# Altium PCB Copy of MB1189.PcbDoc (part 1 of 3)
Units mm, origin at the board's own origin, x right, y up, seen from the top; angles counter-clockwise.
Board outline 60.03 x 127.03 mm, 6 copper layers (TOP, L2_GND, L3_VCC, L4_SIG, L5_GND, BOTTOM), stack 1.58 mm thick; 10 components, 264 nets, 52 pads, 0 vias.
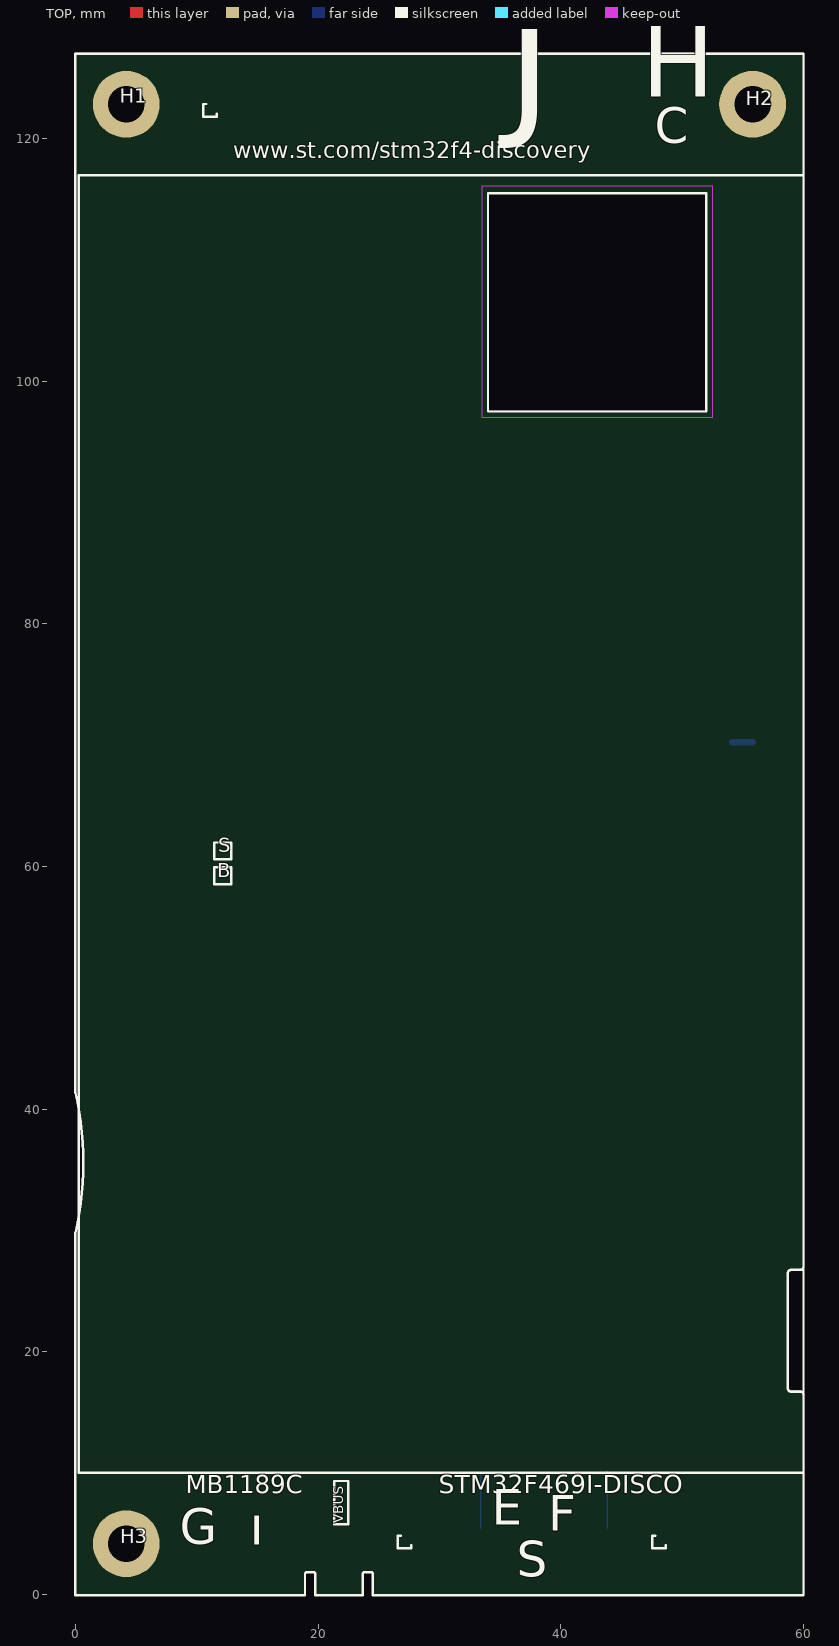
[diagram p0: TOP view]
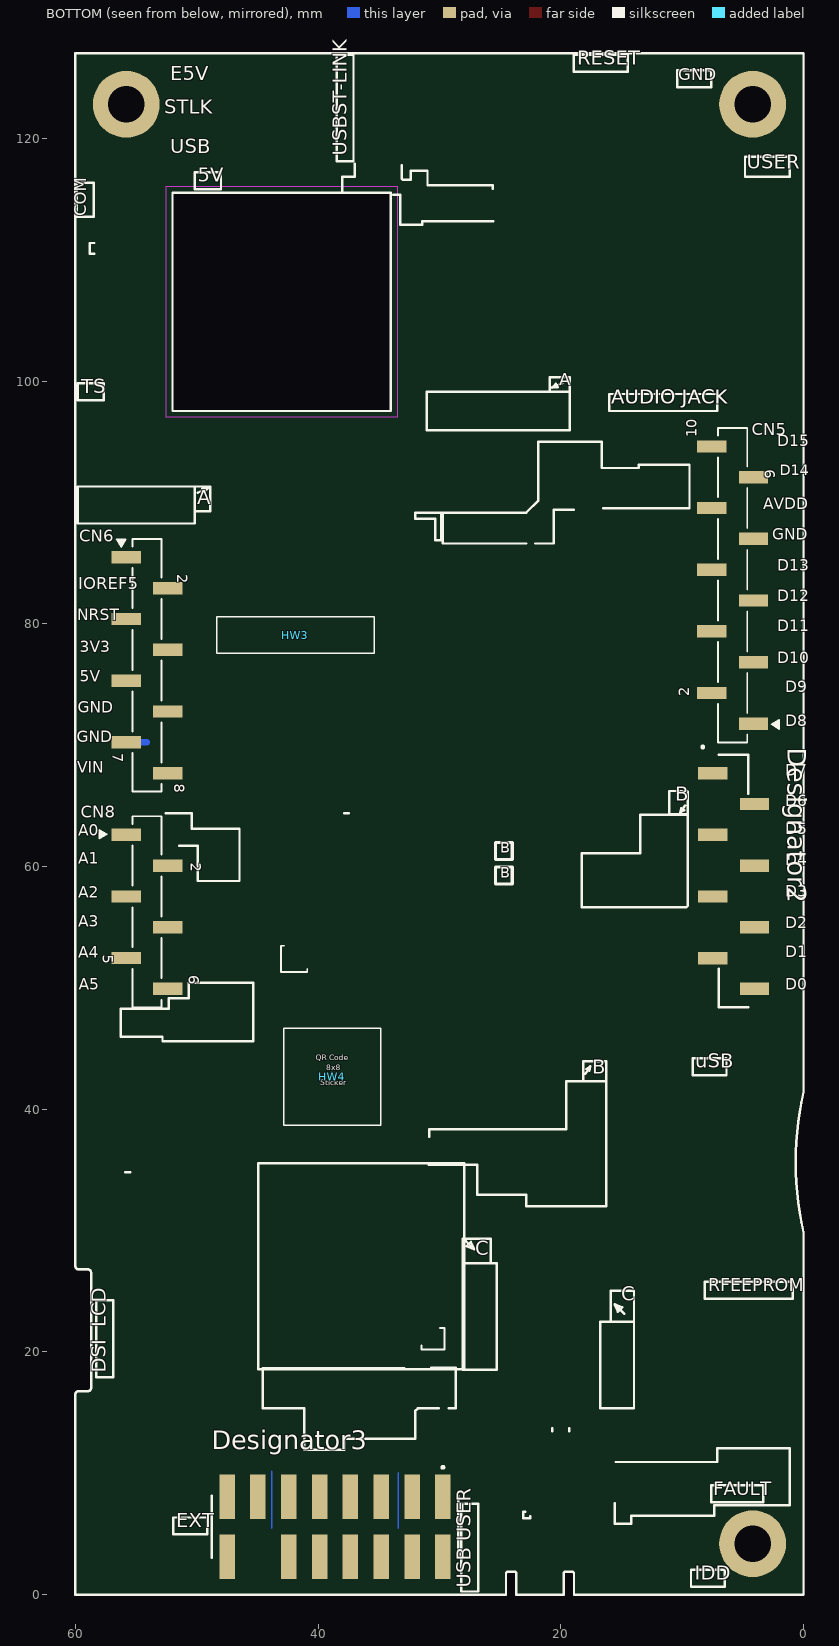
[diagram p1: BOTTOM view, seen from below]
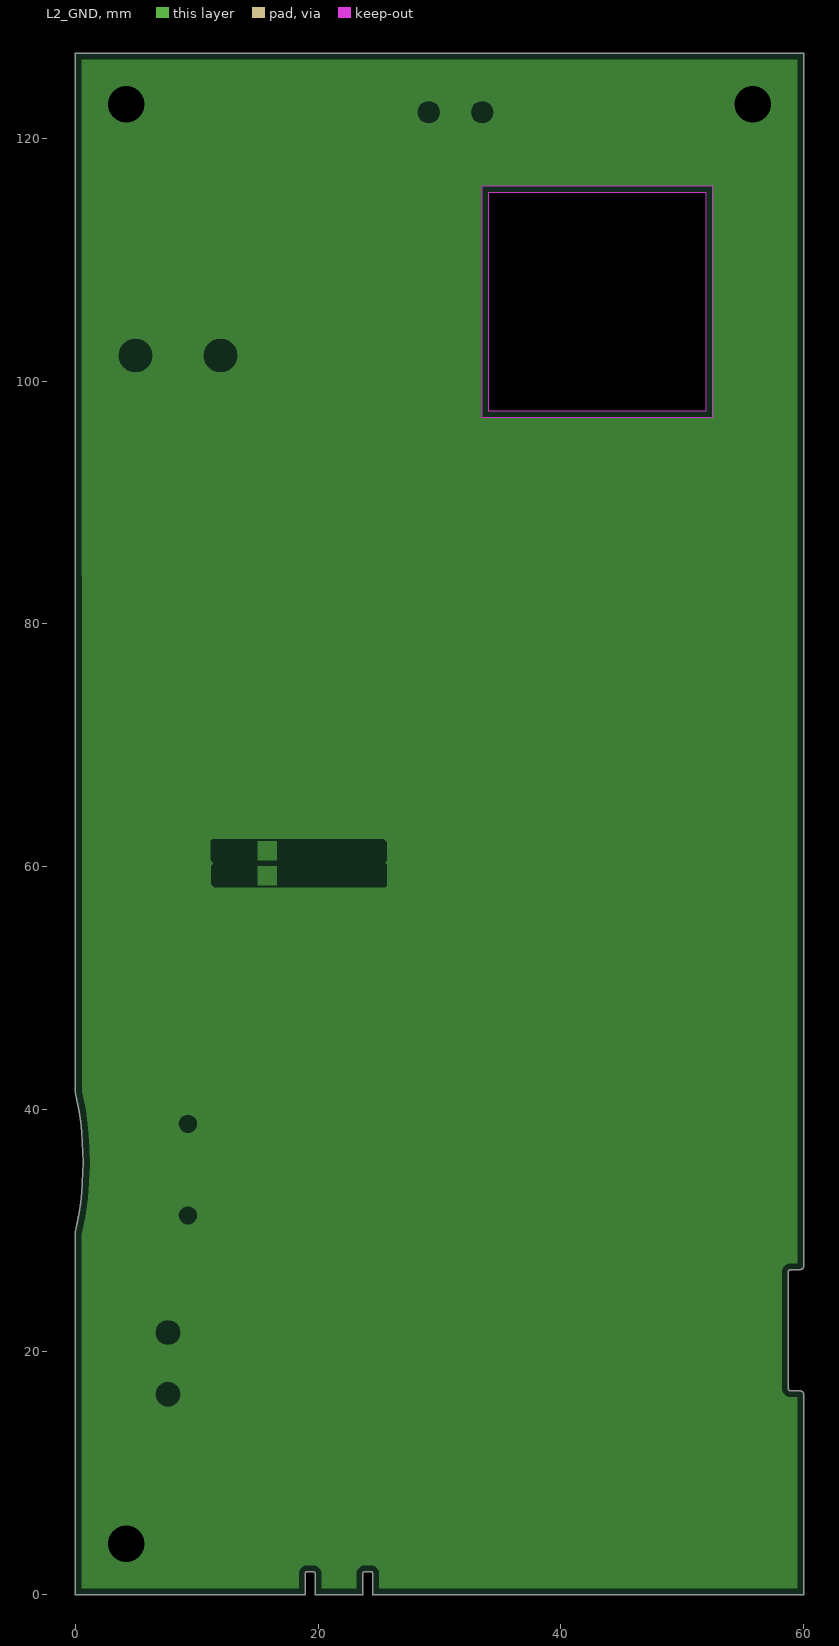
[diagram p2: L2_GND, clearances drawn from the general rule]
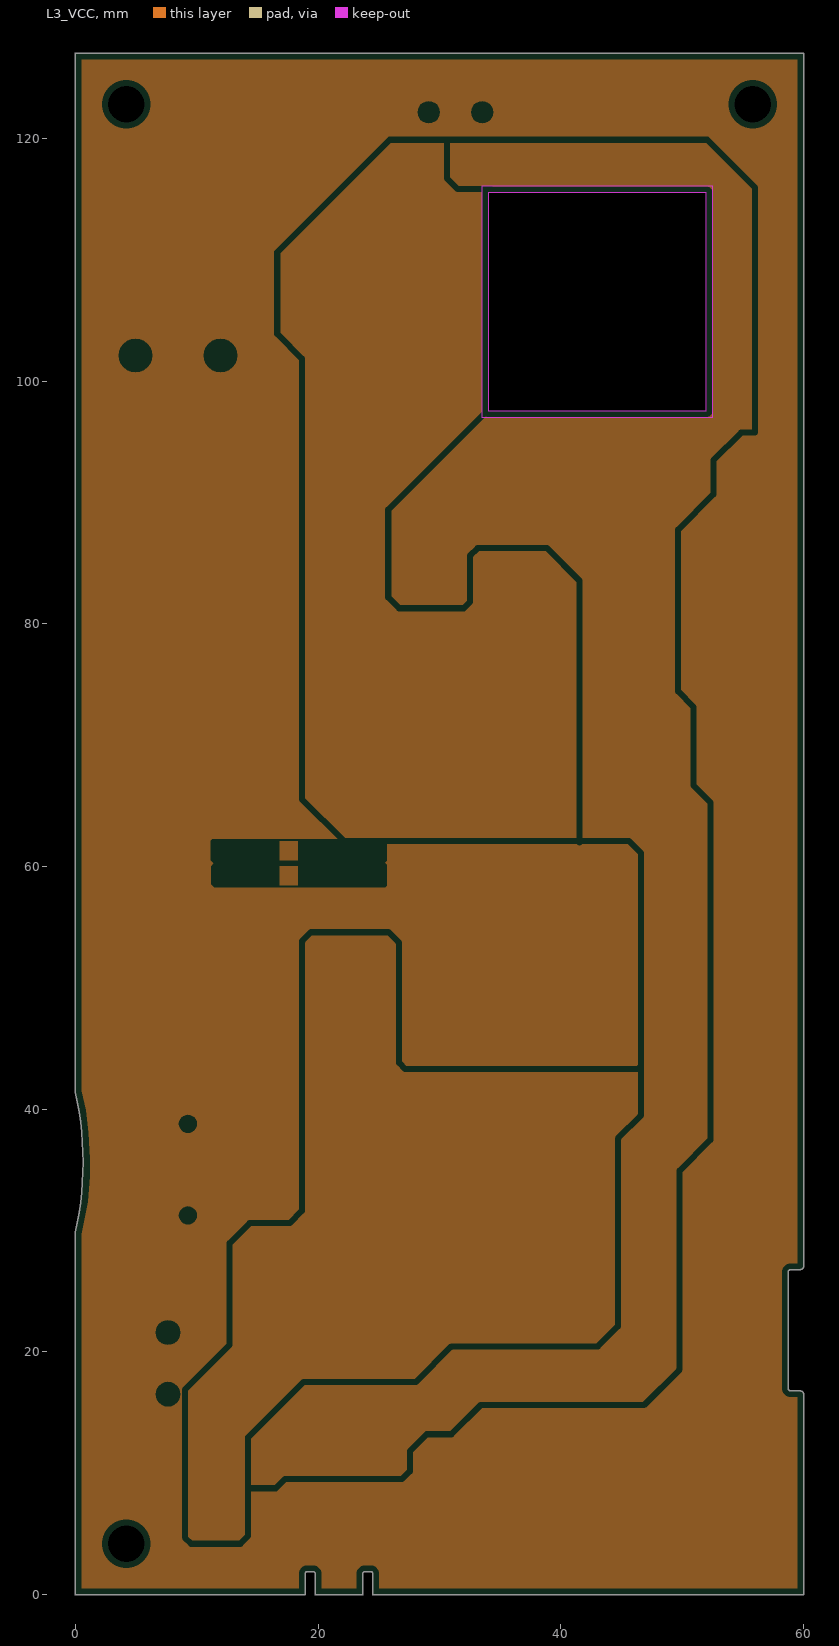
[diagram p3: L3_VCC, clearances drawn from the general rule]
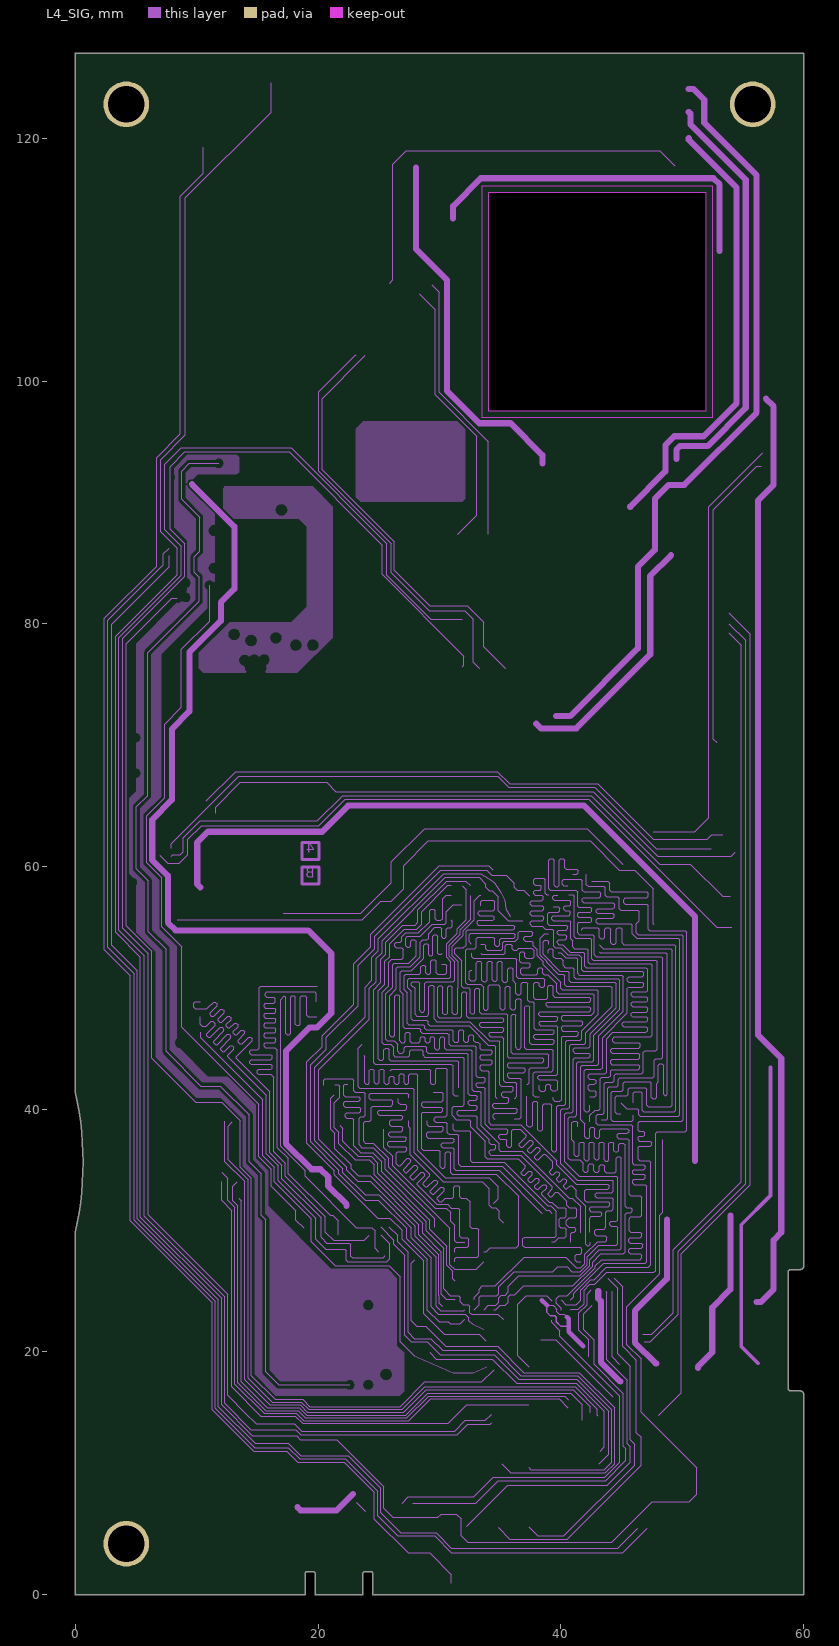
[diagram p4: L4_SIG]
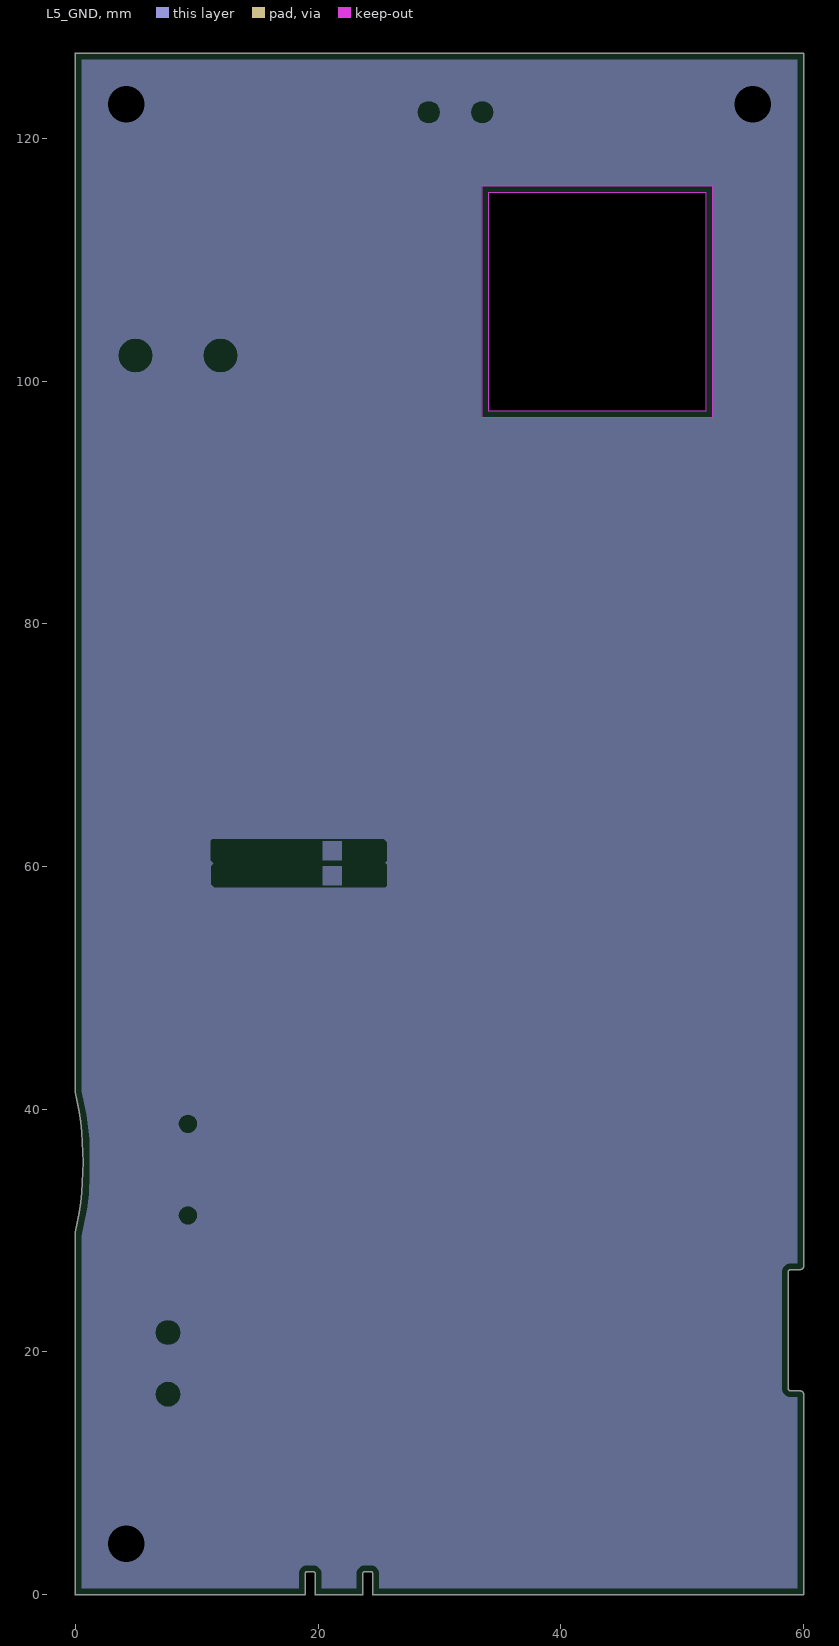
[diagram p5: L5_GND, clearances drawn from the general rule]

## Layer stack, top to bottom
Top Solder: solder mask 0.0102, Solder Resist, Dk 3.5
TOP: signal copper 0.0457
Dielectric 1: core 0.0991, FR-4, Dk 4.3
L2_GND: plane copper 0.0305, net GND
Dielectric2: core 0.1016, FR-4, Dk 4.3
L3_VCC: plane copper 0.0305, net +3V3
Dielectric3: core 0.9652, FR-4, Dk 4.3
L4_SIG: signal copper 0.0305
Dielectric4: core 0.1016, FR-4, Dk 4.3
L5_GND: plane copper 0.0305, net GND
Dielectric5: core 0.0991, FR-4, Dk 4.3
BOTTOM: signal copper 0.0457
Bottom Solder: solder mask 0.0102, Solder Resist, Dk 3.5

## Board outline
0,-0.013 cw(c0,0) -0.013,0 -0.013,29.845 cw(c0,29.845) -0.012,29.849 ccw(c-25.59,35.623) 0.631,35.623 ccw(c-25.59,35.623) -0.012,41.398 cw(c0,41.402) -0.013,41.402 -0.013,127 cw(c0,127) 0,127.013 60,127.013 cw(c60,127) 60.013,127 60.013,27.051 cw(c59.746,27.051) 59.746,26.784 58.967,26.784 ccw(c58.967,26.543) 58.726,26.543 58.726,17.018 ccw(c58.967,17.018) 58.967,16.777 59.746,16.777 cw(c59.746,16.51) 60.013,16.51 60.013,0 cw(c60,0) 60,-0.013 24.517,-0.013 cw(c24.517,0) 24.504,0 24.504,1.78 24.412,1.872 23.772,1.872 23.68,1.78 23.68,0 cw(c23.667,0) 23.667,-0.013 19.767,-0.013 cw(c19.767,0) 19.754,0 19.754,1.78 19.662,1.872 19.022,1.872 18.93,1.78 18.93,0 cw(c18.917,0) 18.917,-0.013
cut-out: 52,97.536 52,115.536 34,115.536 34,97.536

## Design rules (kind name [scope] priority, off if disabled: settings)
Clearance Clearance_Keepout [IsKeepout] p1: gap=0 ignorepadtopadclearanceinfootprint=FALSE
Clearance Clearance_STLK_MCO [(InNet('STLK_MCO') And (Layer = 'L4_SIG')) or (IsVia and Innet('PH0', 'VDD_MCU')) vs InPolygon and (Layer = 'L4_SIG')] p2: gap=0.254 ignorepadtopadclearanceinfootprint=FALSE except(0.153: Via-Fill Via-Poly Via-Region)
Clearance Clearance_BGA [TouchesRoom('RoomDefinition_U11','RoomDefinition_U14')] p3: gap=0.127 ignorepadtopadclearanceinfootprint=FALSE except(0.102: Arc-Arc Arc-Track Arc-SMDPad Arc-THPad Arc-Via Arc-Text Arc-Hole Track-Track Track-SMDPad Track-THPad Track-Via Track-Text Track-Hole SMDPad-Via SMDPad-Text SMDPad-Hole THPad-Via THPad-Text THPad-Hole Via-Text Via-Hole Text-Text Text-Hole; 0.381: Fill-Fill Fill-Poly Fill-Region Poly-Poly Poly-Region Region-Region)
Clearance Clearance_SB [HasFootprint('SB_0603') and IsRegion vs HasFootprint('SB_0603') and IsRegion] p4: gap=0.178 ignorepadtopadclearanceinfootprint=FALSE
Clearance Clearance_2W [InNetClass('A[0..15]') or InNetClass('DATA')] p5: gap=0.127 ignorepadtopadclearanceinfootprint=FALSE except(0.152: SMDPad-Fill SMDPad-Poly SMDPad-Region THPad-Fill THPad-Poly THPad-Region Via-Fill Via-Poly Via-Region Fill-Text Fill-Hole Poly-Text Poly-Hole Region-Text Region-Hole; 0.254: Arc-Fill Arc-Poly Arc-Region Track-Fill Track-Poly Track-Region; 0.508: Fill-Fill Fill-Poly Fill-Region Poly-Poly Poly-Region Region-Region)
Clearance [All] p6: gap=0.127 ignorepadtopadclearanceinfootprint=FALSE except(0.152: Arc-Fill Arc-Poly Arc-Region Track-Fill Track-Poly Track-Region SMDPad-Fill SMDPad-Poly SMDPad-Region THPad-Fill THPad-Poly THPad-Region Via-Fill Via-Poly Via-Region Fill-Text Fill-Hole Poly-Text Poly-Hole Region-Text Region-Hole; 0.508: Fill-Fill Fill-Poly Fill-Region Poly-Poly Poly-Region Region-Region)
DiffPairsRouting DiffPairsRouting_100Ohm [InDifferentialPair('HSSI_CLK', 'HSSI_D0', 'HSSI_D1')] p1: maxlimit=0.279 minlimit=0.102 mostfreqgap=0.277 toplayer_maxgap=0.254 toplayer_prefgap=0.252 toplayer_minwidth=0.127 toplayer_maxwidth=0.254 toplayer_prefwidth=0.129 midlayer1_minwidth=0.102 midlayer1_maxwidth=0.279 midlayer1_prefwidth=0.104 bottomlayer_maxgap=0.254 bottomlayer_prefgap=0.252 bottomlayer_minwidth=0.127 bottomlayer_maxwidth=0.254 bottomlayer_prefwidth=0.129 maxuncoupledlength=12.7
DiffPairsRouting DiffPairsRouting_90Ohm [InDifferentialPair('USB_FS1', 'MICROAB')] p2: maxlimit=0.254 minlimit=0.102 mostfreqgap=0.252 toplayer_maxgap=0.229 toplayer_prefgap=0.226 toplayer_minwidth=0.102 toplayer_maxwidth=0.155 toplayer_prefwidth=0.155 midlayer1_minwidth=0.102 midlayer1_maxwidth=0.13 midlayer1_prefwidth=0.13 bottomlayer_maxgap=0.229 bottomlayer_prefgap=0.226 bottomlayer_minwidth=0.102 bottomlayer_maxwidth=0.155 bottomlayer_prefwidth=0.155 maxuncoupledlength=12.7
HoleSize [All] p1: absolutevalues=TRUE maxlimit=3.048 minlimit=0.025 maxpercent=80.000 minpercent=20.000
MatchedLengths "Schematic Matched Net Lengths_20" [InNetClass('A[0..15]')] p1: tolerance=6.35 checknetsindiffpair=FALSE checkdiffpairvsdiffpair=TRUE checkxsignals=TRUE checkothers=TRUE
MatchedLengths "Schematic Matched Net Lengths_19" [InNet('PC0')] p2: tolerance=6.35 checknetsindiffpair=FALSE checkdiffpairvsdiffpair=TRUE checkxsignals=TRUE checkothers=TRUE
MatchedLengths "Schematic Matched Net Lengths_18" [InNetClass('D[0..31]')] p3: tolerance=6.35 checknetsindiffpair=FALSE checkdiffpairvsdiffpair=TRUE checkxsignals=TRUE checkothers=TRUE
MatchedLengths "Schematic Matched Net Lengths_16" [InNetClass('A[0..11]')] p4: tolerance=6.35 checknetsindiffpair=FALSE checkdiffpairvsdiffpair=TRUE checkxsignals=TRUE checkothers=TRUE
MatchedLengths "Schematic Matched Net Lengths_15" [InNet('PG8')] p5: tolerance=6.35 checknetsindiffpair=FALSE checkdiffpairvsdiffpair=TRUE checkxsignals=TRUE checkothers=TRUE
MatchedLengths "Schematic Matched Net Lengths_14" [InNet('PG15')] p6: tolerance=6.35 checknetsindiffpair=FALSE checkdiffpairvsdiffpair=TRUE checkxsignals=TRUE checkothers=TRUE
MatchedLengths "Schematic Matched Net Lengths_13" [InNet('PH3')] p7: tolerance=6.35 checknetsindiffpair=FALSE checkdiffpairvsdiffpair=TRUE checkxsignals=TRUE checkothers=TRUE
MatchedLengths "Schematic Matched Net Lengths_12" [InNet('PF11')] p8: tolerance=6.35 checknetsindiffpair=FALSE checkdiffpairvsdiffpair=TRUE checkxsignals=TRUE checkothers=TRUE
MatchedLengths "Schematic Matched Net Lengths_11" [InNet('HSSI_CLK_N')] p9: tolerance=2.54 checknetsindiffpair=TRUE checkdiffpairvsdiffpair=FALSE checkxsignals=FALSE checkothers=FALSE
MatchedLengths "Schematic Matched Net Lengths_10" [InNet('HSSI_CLK_P')] p10: tolerance=2.54 checknetsindiffpair=TRUE checkdiffpairvsdiffpair=FALSE checkxsignals=FALSE checkothers=FALSE
MatchedLengths "Schematic Matched Net Lengths_9" [InNet('HSSI_D0_N')] p11: tolerance=2.54 checknetsindiffpair=TRUE checkdiffpairvsdiffpair=FALSE checkxsignals=FALSE checkothers=FALSE
MatchedLengths "Schematic Matched Net Lengths_8" [InNet('HSSI_D0_P')] p12: tolerance=2.54 checknetsindiffpair=TRUE checkdiffpairvsdiffpair=FALSE checkxsignals=FALSE checkothers=FALSE
MatchedLengths "Schematic Matched Net Lengths_7" [InNet('HSSI_D1_N')] p13: tolerance=2.54 checknetsindiffpair=TRUE checkdiffpairvsdiffpair=FALSE checkxsignals=FALSE checkothers=FALSE
MatchedLengths "Schematic Matched Net Lengths_6" [InNet('PF8')] p14: tolerance=2.54 checknetsindiffpair=FALSE checkdiffpairvsdiffpair=TRUE checkxsignals=TRUE checkothers=TRUE
MatchedLengths "Schematic Matched Net Lengths_5" [InNet('PF9')] p15: tolerance=2.54 checknetsindiffpair=FALSE checkdiffpairvsdiffpair=TRUE checkxsignals=TRUE checkothers=TRUE
MatchedLengths "Schematic Matched Net Lengths_4" [InNet('PF7')] p16: tolerance=2.54 checknetsindiffpair=FALSE checkdiffpairvsdiffpair=TRUE checkxsignals=TRUE checkothers=TRUE
MatchedLengths "Schematic Matched Net Lengths_3" [InNet('PF6')] p17: tolerance=2.54 checknetsindiffpair=FALSE checkdiffpairvsdiffpair=TRUE checkxsignals=TRUE checkothers=TRUE
MatchedLengths "Schematic Matched Net Lengths_2" [InNet('PB6')] p18: tolerance=2.54 checknetsindiffpair=FALSE checkdiffpairvsdiffpair=TRUE checkxsignals=TRUE checkothers=TRUE
MatchedLengths "Schematic Matched Net Lengths_1" [InNet('PF10')] p19: tolerance=2.54 checknetsindiffpair=FALSE checkdiffpairvsdiffpair=TRUE checkxsignals=TRUE checkothers=TRUE
MatchedLengths "Schematic Matched Net Lengths" [InNet('HSSI_D1_P')] p20: tolerance=2.54 checknetsindiffpair=TRUE checkdiffpairvsdiffpair=FALSE checkxsignals=FALSE checkothers=FALSE
PlaneClearance PlaneClearance_Fixations [HasFootprint('HOLE_C5R5D3')] p1: clearance=0.381
PlaneClearance "PlaneClearance_Via 16mil" [(ObjectKind = 'Via') And (AsMils(PadXSize_TopLayer) = 16) And (AsMils(PadXSize_MidLayer1) = 16) And (AsMils(PadXSize_BottomLayer) = 16)] p2: clearance=0.229
PlaneClearance PlaneClearance_CN4 [InComponent('CN4')] p3: clearance=0.381
PlaneClearance PlaneClearance_NonPlatedPads [(PadIsPlated = 'False')] p4: clearance=0.406
PlaneClearance PlaneClearance_Via [IsVia] p5: clearance=0.254
PlaneClearance [All] p6: clearance=0.508
PlaneConnect PlaneConnect_Fixations [HasFootprint('HOLE_C5R5D3')] p1: planeconnectstyle=Relief reliefexpansion=0.203 reliefentries=4 reliefconductorwidth=0.762 reliefairgap=0.178
PlaneConnect [All] p2: pad.planeconnectstyle=Relief pad.reliefexpansion=0.203 pad.reliefentries=4 pad.reliefconductorwidth=0.381 pad.reliefairgap=0.178 via.planeconnectstyle=Direct via.reliefexpansion=0.508 via.reliefentries=4 via.reliefconductorwidth=0.254 via.reliefairgap=0.254
PolygonConnect PolygonConnect_CN13 [IsPad and (Name = 'CN13-10')] p1: connectstyle=Direct reliefconductorwidth=0.254 reliefentries=4 polygonreliefangle="90 Angle" airgapwidth=0.254
PolygonConnect [All] p2: thpad.connectstyle=Relief thpad.reliefconductorwidth=0.254 thpad.reliefentries=4 thpad.polygonreliefangle="90 Angle" thpad.airgapwidth=0.152 smdpad.connectstyle=Relief smdpad.reliefconductorwidth=0.254 smdpad.reliefentries=4 smdpad.polygonreliefangle="90 Angle" smdpad.airgapwidth=0.152 via.connectstyle=Direct via.reliefconductorwidth=0.254 via.reliefentries=4 via.polygonreliefangle="90 Angle" via.airgapwidth=0.254
RoutingVias [All] p1: holewidth=0.3 width=0.6 viastyle="Through Hole" minholewidth=0.2 minwidth=0.25 maxholewidth=0.5 maxwidth=0.65
SolderMaskExpansion SolderMaskExpansion_1 [IsVia] p1: expansion=0.076 istentingtop=FALSE soldermaskfromhole=TRUE
SolderMaskExpansion [All] p2: expansion=0.076 istentingtop=FALSE
Width Width_BGA [TouchesRoom('RoomDefinition_U11','RoomDefinition_U14')] p1: maxlimit=1.016 minlimit=0.102 preferedwidth=0.102
Width Width_20mil [InNet('GND', 'E5V', '+1V8', '+3V3', 'VDD_MCU', 'U5V_ST_LINK')] p2: maxlimit=2.032 minlimit=0.127 preferedwidth=0.508
Width [All] p3: maxlimit=1.016 minlimit=0.102 preferedwidth=0.127 toplayer_minwidth=0.127 midlayer1_prefwidth=0.102 bottomlayer_minwidth=0.127 minimp=2.670000 maximp=36.460000 favimp=1.510000
26 further rules are at their usual default settings.

## Classes and differential pairs
net class D[0..31]: D0 D1 D2 D3 D4 D5 D6 D7 D8 D9 D10 D11 D12 D13 D14 D15 D16 D17 D18 D19 D20 D21 D22 D23 D24 D25 D26 D27 D28 D29 D30 D31
net class A[0..15]: A0 A1 A2 A3 A4 A5 A6 A7 A8 A9 A10 A11 A14 A15
component class U_DSI_LCD: ZZ1
component class "U_Arduino_ Connectors": CN5 CN6 CN8
differential pair USB_FS1: +USB_FS1_P -USB_FS1_N
differential pair MICROAB: +MICROAB_P -MICROAB_N
differential pair HSSI_D1: +HSSI_D1_P -HSSI_D1_N
differential pair HSSI_D0: +HSSI_D0_P -HSSI_D0_N
differential pair HSSI_CLK: +HSSI_CLK_P -HSSI_CLK_N

## Components (designator, comment, footprint, x,y, rotation, side; value= is the part's Value field where it differs from the comment)
CN5 "SSW-110-22-X-S-VS" SSW-110-22-X-S-VS 5.842,83.185 r90 bottom
CN6 "SSW-108-22-X-S-VS" SSW-108-22-X-S-VS 54.102,76.581 r270 bottom
CN8 "SAMTEC SSW-106-22-x-S-VS" SSW-106-22-X-S-VS 54.102,56.261 r270 bottom
Designator2 "Comment" SAMTEC_SSW-108-22-X-S-VS 5.765,58.8 r270 bottom
Designator3 "Comment" SAMTEC_TSM-108-01-L-DV-014 38.61,5.585 r180 bottom
H1 "POSITION HOLE" HOLE_C5R5D3 4.191,122.809 r0 top
H2 "POSITION HOLE" HOLE_C5R5D3 55.809,122.809 r0 top
H3 "POSITION HOLE" HOLE_C5R5D3 4.191,4.191 r0 top
HW3 "STICKER_BOARD_CPN" STICKER_BOARD-CPN_13X3 41.87,79.07 r180 bottom
HW4 "STICKER_QR_CODE" STICKER_QR_CODE_8X8 38.82,42.67 r180 bottom

## Footprints (in the part's own frame and the unit in brackets; to place one, negate y for a bottom-side part, rotate by r counter-clockwise, add the part's x,y. Pads: shape width x height; smd on the part's side, far side on the other; paste and mask are expansions set on the pad)
HOLE_C5R5D3 [mil] "HOLE_C5R5D3"
  round 217 / inner round 148 / far side round 217 hole 118: 1(0,0)
  body extent -113,-113 113,113, height 150
SAMTEC_SSW-108-22-X-S-VS [mm]
  rect 1.02x2.41 smd: 01(-8.89,-1.715) 02(-6.35,1.715) 03(-3.81,-1.715) 04(-1.27,1.715) 05(1.27,-1.715) 06(3.81,1.715) 07(6.35,-1.715) 08(8.89,1.715)
  silkscreen extent -11.14,-2.64 10.42,1.2, body extent -10.41,-2.58 10.41,2.58, height 9.91
SAMTEC_TSM-108-01-L-DV-014 [mm]
  rect 1.27x3.68 smd: 01(8.89,2.475) 02(8.89,-2.475) 03(6.35,2.475) 04(6.35,-2.475) 05(3.81,2.475) 06(3.81,-2.475) 07(1.27,2.475) 08(1.27,-2.475) 09(-1.27,2.475) 10(-1.27,-2.475) 11(-3.81,2.475) 12(-3.81,-2.475) 13(-6.35,2.475) 15(-8.89,2.475) 16(-8.89,-2.475)
  silkscreen extent -10.16,-2.54 10.16,5, body extent -10.16,-3.81 10.16,3.89, height 9.65
SSW-106-22-X-S-VS [mil] "SSW-106-22-X-S-VS"
  rect 40x95 smd: 1(-250,-67.5) 2(-150,67.5) 3(-50,-67.5) 4(50,67.5) 5(150,-67.5) 6(250,67.5)
  silkscreen extent -310,-155 310,47, body extent -310,-120 310,120, height 150
SSW-108-22-X-S-VS [mil] "SSW-108-22-X-S-VS"
  rect 40x95 smd: 1(-350,-67.5) 2(-250,67.5) 3(-150,-67.5) 4(-50,67.5) 5(50,-67.5) 6(150,67.5) 7(250,-67.5) 8(350,67.5)
  silkscreen extent -410,-99 410,47, body extent -410,-120 410,120, height 150
SSW-110-22-X-S-VS [mil] "SSW-110-22-X-S-VS"
  rect 40x95 smd: 1(-450,-67.5) 2(-350,67.5) 3(-250,-67.5) 4(-150,67.5) 5(-50,-67.5) 6(50,67.5) 7(150,-67.5) 8(250,67.5) 9(350,-67.5) 10(450,67.5)
  silkscreen extent -510,-150 510,47, body extent -510,-120 510,120, height 150
STICKER_BOARD-CPN_13X3 [mm] "Sticker to mention board CPN code"
  silkscreen extent -6.5,-1.5 6.5,1.5, body extent -6.5,-1.5 6.5,1.5, height 0.01
STICKER_QR_CODE_8X8 [mm] "Sticker to mention board QR code 8X8"
  silkscreen extent -4,-4 4,4

## Part data
CN5: library part "Header 10X1_Female", "Header, 10-Pin, Single row,female", Manuf_1=SAMTEC, Manuf_Part_1=SSW-110-22-x-S-VS, LatestRevisionDate=17-Jul-2002, LatestRevisionNote="Re-released for DXP Platform.", Ordered by=Subcon, Publisher="Altium Limited", Silkscreen="pin names as in schematic"
CN6: library part "Header 8X1_Female", "Header, 8-Pin, Single row,female", Manuf_1=SAMTEC, Manuf_Part_1=SSW-108-22-x-S-VS, LatestRevisionDate=17-Jul-2002, LatestRevisionNote="Re-released for DXP Platform.", Ordered by=Subcon, Publisher="Altium Limited", Silkscreen="pin names as in schematic"
CN8: library part "Header 6X1_Female", "Header, 6-Pin, Single row,female SMD", Manuf_1=SAMTEC, Manuf_Part_1=SSW-106-22-x-S-VS, LatestRevisionDate=17-Jul-2002, LatestRevisionNote="Re-released for DXP Platform.", Ordered by=Subcon, Publisher="Altium Limited", Silkscreen="pin names as in schematic"
H1 H2 H3: Ordered by=Subcon

## Free pads (board coordinates)
  round 0.508 on Mech16: 1(-26.171,-56.053) 1(115.945,-55.727)

## Nets (pads, with @x,y where several pads share a name; then routed paths per layer and width w, separated by ;. In a path a pad name is that pad's centre, name@x,y a point inside that pad or via, vN(x,y) a via of type N, cw(c..) or ccw(c..) an arc to the next point about the centre after c; other vN are vias at no path point)
+1V8: 
+3V3: CN6.2 CN6.4
+3V3_ST_LINK:  | length 29.6
  L4_SIG w0.508: 31.115,113.411 31.115,114.427 33.401,116.713 52.578,116.713 53.086,116.205 53.086,110.744
+5V: CN6.5
A:  | length 13.7
  L4_SIG w0.508: 51.308,18.669 51.308,18.796 52.476,19.964 52.476,23.647 53.975,25.146 53.975,31.242
A0:  | length 22
  L4_SIG w0.102: 21.336,41.199 21.031,40.894 21.031,38.354 21.387,37.998 21.387,36.754 22.733,35.408 22.733,35.077 23.317,34.493 24.284,34.493 28.296,30.482 28.296,29.643 29.947,27.992 29.947,24.68 29.972,24.655 29.972,24.019 30.242,23.749
A1:  | length 23.4
  L4_SIG w0.102: 21.387,42.012 21.666,42.012 21.793,41.885 21.793,40.97 21.336,40.513 21.336,38.48 21.717,38.099 21.717,37.135 23.038,35.814 24.232,35.814 24.613,35.433 24.613,34.596 28.6,30.608 28.6,29.769 30.15,28.22 30.15,24.764 30.569,24.346 31.2,24.346 31.272,24.274
A2:  | length 25.8
  L4_SIG w0.102: 22.454,42.037 22.2,42.037 22.123,41.961 22.123,41.148 22.25,41.021 23.343,41.021 23.47,40.894 23.47,40.767 23.343,40.64 22.225,40.64 22.098,40.513 22.098,40.284 22.225,40.157 23.368,40.157 23.495,40.03 23.495,39.827 23.368,39.7 22.352,39.7 22.225,39.573 22.225,39.37 22.352,39.243 22.809,39.243 22.936,39.116 22.936,36.982 23.495,36.424 24.232,36.424 ; 24.232,36.424 24.484,36.424 25.222,35.686 25.222,34.849 29.21,30.861 29.21,30.093 29.433,29.87 29.439,29.87 30.607,28.702 30.607,27.144 31.11,26.641 31.11,26.035 31.272,25.874
A3:  | length 23.6
  L4_SIG w0.102: 27.483,39.04 27.483,38.557 27.61,38.43 27.61,36.246 29.21,34.646 29.21,34.493 28.652,33.935 28.652,33.756 28.808,33.6 28.988,33.6 29.55,34.162 29.719,34.162 29.838,34.043 29.838,33.875 29.245,33.282 29.245,33.138 29.388,32.994 29.532,32.994 30.112,33.574 30.281,33.574 30.4,33.456 30.4,33.287 29.82,32.707 29.82,32.563 29.997,32.385 30.175,32.385 30.463,32.673 31.039,32.673 31.166,32.8 31.166,33.553 31.293,33.68 31.547,33.68 31.674,33.553 31.674,32.8 31.801,32.673 32.199,32.673 32.516,32.355 32.516,30.328 32.643,30.201 33.122,30.201 33.249,30.074 33.249,27.94 33.122,27.813 31.399,27.813 31.272,27.686 31.272,27.428
A4:  | length 35.2
  L4_SIG w0.102: 26.619,40.843 26.619,40.513 26.746,40.386 27.178,40.386 27.305,40.259 27.305,40.047 27.178,39.92 25.019,39.92 24.892,39.793 24.892,39.641 25.019,39.514 26.848,39.514 26.975,39.387 26.975,39.243 26.848,39.116 26.035,39.116 25.908,38.989 25.908,38.735 26.035,38.608 26.848,38.608 26.975,38.481 26.975,38.278 26.848,38.151 25.951,38.151 25.832,38.032 25.832,37.864 25.951,37.744 27.168,37.744 27.28,37.633 27.28,37.475 27.168,37.363 25.857,37.363 25.73,37.236 25.73,37.033 25.857,36.906 27.179,36.906 27.305,36.78 27.305,36.601 27.179,36.474 26.568,36.474 26.441,36.347 26.441,35.509 26.603,35.347 26.747,35.347 27.34,35.94 27.484,35.94 27.628,35.796 27.628,35.652 27.035,35.06 27.035,34.916 27.179,34.772 27.322,34.772 27.915,35.365 28.059,35.365 28.203,35.221 28.203,35.077 27.61,34.485 27.61,34.341 27.754,34.197 27.897,34.197 28.49,34.79 28.634,34.79 28.778,34.646 28.778,34.502 28.185,33.91 28.185,33.766 29.794,32.156 30.683,32.156 30.988,31.852 31.547,31.852 31.674,31.725 31.674,29.54 31.801,29.413 32.3,29.413 32.427,29.286 32.427,28.753 32.3,28.626 31.399,28.626 31.272,28.499 31.272,28.228
A5:  | length 13
  L4_SIG w0.102: 25.425,38.329 25.425,36.83 26.137,36.119 26.137,35.357 29.642,31.852 30.556,31.852 30.916,31.492 30.916,30.755 31.242,30.429 31.242,29.155 31.369,29.028 32.072,29.028
A6: 
A7: 
A8:  | length 30
  L4_SIG w0.102: 23.749,44.45 23.825,44.374 23.825,42.182 23.944,42.062 24.112,42.062 24.232,42.182 24.232,43.188 24.351,43.307 24.519,43.307 24.638,43.188 24.638,42.207 24.757,42.088 24.925,42.088 25.044,42.207 25.044,43.188 25.164,43.307 25.332,43.307 25.451,43.188 25.451,42.182 25.57,42.062 25.738,42.062 25.857,42.182 25.857,42.604 25.976,42.723 26.144,42.723 26.264,42.604 26.264,42.182 26.383,42.062 26.551,42.062 26.67,42.182 26.67,42.807 26.789,42.926 26.957,42.926 27.076,42.807 27.076,42.182 27.196,42.062 27.364,42.062 27.483,42.182 27.483,42.799 27.61,42.926 28.092,42.926 28.219,42.799 28.219,36.601 30.48,34.341 34.112,34.341 34.849,33.604 34.849,32.605 34.472,32.228
A9: 
A10: 
A11:  | length 24.4
  L4_SIG w0.102: 23.622,45.339 23.317,45.034 23.317,41.859 23.444,41.732 27.788,41.732 27.915,41.605 27.915,36.424 30.315,34.023 33.515,34.023 34.116,33.422 34.116,32.081 34.325,31.873 34.625,31.873 34.916,31.581 34.916,30.984 35.272,30.628
A14:  | length 27
  L4_SIG w0.102: 25.933,43.155 25.933,43.18 26.06,43.307 29.144,43.307 29.271,43.18 29.271,42.139 29.372,42.037 29.576,42.037 29.677,42.139 29.677,43.256 29.779,43.358 30.531,43.358 30.658,43.231 30.658,39.522 30.531,39.395 29.693,39.395 29.566,39.268 29.566,39.065 29.693,38.938 30.531,38.938 30.658,38.811 30.658,38.049 30.785,37.922 31.445,37.922 31.572,37.795 31.572,35.458 31.75,35.281 35.179,35.281 38.807,31.652 39.04,31.652 39.264,31.428
A15:  | length 19.1
  L4_SIG w0.102: 28.981,39.04 28.981,38.735 29.108,38.608 30.175,38.608 30.302,38.481 30.302,38.252 30.175,38.125 29.058,38.125 28.931,37.998 28.931,37.744 29.058,37.617 31.09,37.617 31.217,37.49 31.217,37.363 31.09,37.236 30.276,37.236 30.15,37.11 30.15,36.931 30.276,36.805 31.09,36.805 31.217,36.678 31.217,35.077 31.344,34.95 34.925,34.95 38.447,31.428 38.464,31.428
AIN_1: 
AUDIO_RST: 
BLGND: 
BLVDD: 
BOOT0: 
CABC: 
CUR_SEL: 
D0:  | length 55.7
  L4_SIG w0.102: 30.963,57.633 30.556,57.633 30.251,57.328 30.251,55.702 30.124,55.575 29.794,55.575 29.667,55.702 29.667,56.363 29.54,56.49 29.312,56.49 29.185,56.363 29.185,55.448 28.27,54.534 27.203,54.534 26.873,54.204 26.873,53.873 26.746,53.746 26.441,53.746 26.314,53.619 26.314,53.419 26.419,53.315 26.899,53.315 27.026,53.188 27.026,52.476 26.899,52.349 26.086,52.349 25.832,52.095 25.832,50.19 25.273,49.632 25.273,45.466 25.4,45.339 25.984,45.339 26.213,45.11 26.213,44.442 26.332,44.323 27.44,44.323 27.559,44.442 27.559,44.755 27.686,44.882 28.524,44.882 28.651,44.755 28.651,44.425 28.778,44.298 31.914,44.298 32.041,44.171 32.041,40.386 31.914,40.259 31.166,40.259 31.039,40.132 31.039,39.497 31.394,39.141 32.461,39.141 32.588,39.014 32.588,38.823 32.588,38.557 33.782,37.363 33.782,36.068 33.934,35.916 36.474,35.916 37.073,35.317 37.073,35.174 36.721,34.822 36.721,34.679 36.865,34.534 37.008,34.534 37.36,34.887 37.503,34.887 37.648,34.742 37.648,34.599 37.296,34.247 37.296,34.104 37.44,33.959 37.583,33.959 37.935,34.312 38.078,34.312 38.223,34.167 38.223,34.024 37.871,33.672 37.871,33.529 38.015,33.384 38.158,33.384 38.403,33.63 38.536,33.762 38.704,33.762 38.823,33.643 38.823,33.475 38.446,33.097 38.446,32.953 39.052,32.347 39.256,32.347 39.73,31.873 40.31,31.873 40.437,31.746 40.437,31.191 40.31,31.064 39.98,31.064 39.853,30.937 39.853,30.353 39.98,30.226 40.31,30.226 40.437,30.099 40.437,29.528 40.31,29.401 39.84,29.401 39.501,29.062 39.26,29.062
D1:  | length 55.5
  L4_SIG w0.102: 31.818,56.849 31.119,56.849 30.556,56.286 30.556,55.372 30.429,55.245 29.413,55.245 28.397,54.229 27.33,54.229 27.203,54.102 27.203,53.466 27.33,53.34 27.509,53.34 27.635,53.466 27.635,53.848 27.762,53.975 27.94,53.975 28.067,53.848 28.067,52.654 27.457,52.045 26.264,52.045 26.137,51.918 26.137,50.063 25.578,49.505 25.578,45.771 25.705,45.644 26.264,45.644 26.543,45.364 26.543,44.755 26.67,44.628 26.949,44.628 27.076,44.755 27.076,45.06 27.203,45.187 28.829,45.187 28.956,45.06 28.956,44.729 29.083,44.602 32.258,44.602 32.385,44.475 32.385,41.25 32.487,41.149 33.002,41.149 33.122,41.029 33.122,40.861 33.002,40.742 32.511,40.742 32.385,40.616 32.385,40.437 32.511,40.31 32.977,40.31 33.096,40.191 33.096,40.023 32.977,39.904 31.597,39.904 31.471,39.777 31.471,39.598 31.597,39.472 32.995,39.472 33.122,39.345 33.122,38.456 34.088,37.489 34.088,37.236 34.215,37.109 34.493,37.109 34.62,36.982 34.62,36.779 34.493,36.652 34.214,36.652 34.087,36.525 34.087,36.347 34.214,36.22 36.678,36.22 39.311,33.587 39.311,33.443 38.951,33.083 38.951,32.939 39.095,32.795 39.239,32.795 39.599,33.155 39.743,33.155 40.471,32.427 40.471,32.081 40.679,31.873 41.173,31.873 41.3,31.746 41.3,31.166 41.173,31.039 40.691,31.039 40.437,30.785 40.437,30.48 40.665,30.251 41.123,30.251 41.25,30.124 41.25,29.972 41.123,29.845 40.953,29.845 40.826,29.718 40.826,29.028
D2:  | length 28.2
  L4_SIG w0.102: 30.988,58.445 30.977,58.457 30.694,58.457 28.524,56.287 28.524,55.245 28.118,54.839 27.076,54.839 25.883,53.645 25.883,52.578 25.476,52.172 25.476,50.292 24.943,49.759 24.943,44.145 25.07,44.018 25.298,44.018 25.425,44.145 25.425,44.907 25.552,45.034 25.73,45.034 25.857,44.907 25.857,44.12 25.984,43.993 31.445,43.993 31.572,43.866 31.572,41.783
D3:  | length 29.6
  L4_SIG w0.102: 31.55,41.123 31.242,41.123 31.115,41.25 31.115,43.561 30.988,43.688 24.714,43.688 24.587,43.815 24.587,49.86 25.171,50.444 25.171,52.349 25.578,52.756 25.578,53.772 26.975,55.169 27.991,55.169 28.219,55.397 28.219,56.413 30.607,58.801 32.17,58.801 32.53,58.442
D4:  | length 27.8
  L4_SIG w0.102: 31.876,58.422 32.206,58.092 32.206,55.624 31.451,54.87 31.451,54.514 30.582,53.645 30.582,52.502 30.937,52.146 30.937,50.927 30.81,50.8 27.508,50.8 27.381,50.673 27.381,49.987 27.661,49.708 27.661,47.447 27.788,47.32 28.931,47.32 29.058,47.193 29.058,46.99 29.185,46.863 32.436,46.863 34.023,45.276 34.519,45.276 34.646,45.149 34.646,40.996 34.722,40.919
D5:  | length 45.4
  L4_SIG w0.102: 32.561,57.578 32.561,55.65 31.709,54.798 31.709,54.422 30.785,53.497 30.785,52.603 31.242,52.146 31.242,50.622 31.115,50.495 28.931,50.495 28.804,50.368 28.804,48.132 28.677,48.006 28.498,48.006 28.372,48.132 28.372,50.368 28.245,50.495 27.813,50.495 27.686,50.368 27.686,50.216 27.813,50.089 27.889,50.089 28.016,49.962 28.016,47.803 28.143,47.676 29.007,47.676 29.134,47.803 29.134,50.089 29.261,50.216 29.439,50.216 29.566,50.089 29.566,47.447 29.794,47.219 32.512,47.219 34.099,45.631 34.887,45.631 34.976,45.542 34.976,42.012 35.103,41.885 35.941,41.885 36.068,41.758 36.068,41.554 35.941,41.427 35.255,41.427 35.128,41.3 35.128,41.097 35.255,40.97 35.585,40.97 35.712,40.843 35.712,40.615 35.585,40.488 34.519,40.488 34.392,40.361 34.392,40.183 34.519,40.056 36.279,40.056 36.398,39.937 36.398,39.769 36.279,39.649 34.544,39.649 34.417,39.522 34.417,39.294 34.544,39.167 34.569,39.167
D6:  | length 48.2
  L4_SIG w0.102: 33.401,56.769 33.401,57.099 33.528,57.226 34.442,57.226 34.569,57.099 34.569,56.49 34.442,56.363 33.317,56.363 33.198,56.243 33.198,56.075 33.317,55.956 34.374,55.956 34.493,55.837 34.493,55.669 34.374,55.55 33.208,55.55 33.096,55.438 33.096,55.28 33.208,55.169 36.093,55.169 36.22,55.042 36.22,54.914 36.094,54.788 32.334,54.788 32.207,54.661 32.207,53.518 31.979,53.289 31.394,53.289 31.267,53.162 31.267,52.812 31.852,52.227 31.852,50.114 31.979,49.987 32.41,49.987 32.537,49.86 32.537,47.965 32.649,47.854 32.807,47.854 32.918,47.965 32.918,49.843 33.038,49.962 33.206,49.962 33.325,49.843 33.325,47.981 33.452,47.854 35.484,47.854 35.611,47.727 35.611,44.323 35.712,44.221 38.489,44.221 38.608,44.102 38.608,43.934 38.489,43.815 35.712,43.815 35.611,43.713 35.611,43.51 35.712,43.409 36.939,43.409 37.059,43.289 37.059,43.121 36.939,43.002 35.712,43.002 35.611,42.901 35.611,42.672 35.738,42.545 36.601,42.545 36.728,42.418 36.728,39.319 36.601,39.192 36.144,39.192
D7:  | length 44.6
  L4_SIG w0.102: 33.388,57.632 33.299,57.632 32.855,57.188 32.855,55.613 31.953,54.712 31.953,54.331 31.039,53.416 31.039,52.654 31.547,52.146 31.547,49.987 31.521,49.962 31.521,47.93 31.394,47.803 31.191,47.803 31.064,47.93 31.064,50.063 30.937,50.19 30.81,50.19 30.683,50.063 30.683,47.922 30.564,47.803 30.396,47.803 30.277,47.922 30.277,50.046 30.158,50.165 29.99,50.165 29.87,50.046 29.87,47.65 29.997,47.523 31.699,47.523 31.826,47.65 31.826,49.563 31.945,49.682 32.113,49.682 32.233,49.563 32.233,47.676 32.36,47.549 35.161,47.549 35.281,47.43 35.281,47.262 35.161,47.142 33.444,47.142 33.325,47.023 33.325,46.855 33.444,46.736 35.169,46.736 35.281,46.624 35.281,46.467 35.169,46.355 34.198,46.355 34.087,46.243 34.087,46.086 34.198,45.974 35.128,45.974 35.281,45.822 35.281,42.342 35.408,42.215 36.246,42.215 36.373,42.088 36.373,41.046 36.246,40.919 36.17,40.919
D8:  | length 46.3
  L4_SIG w0.102: 33.414,53.607 33.692,53.607 33.807,53.492 33.807,53.238 33.934,53.111 35.077,53.111 35.204,53.238 35.204,53.721 35.331,53.848 36.246,53.848 36.5,54.102 36.5,54.559 36.601,54.661 37.549,54.661 37.668,54.542 37.668,54.374 37.549,54.254 37.059,54.254 36.932,54.127 36.932,53.95 37.059,53.823 37.617,53.823 37.744,53.696 37.744,53.467 38.075,53.137 38.075,52.629 38.557,52.146 38.557,51.918 40.005,50.47 40.005,49.962 40.132,49.835 42.951,49.835 43.078,49.708 43.078,47.803 41.732,46.457 41.732,45.796 41.605,45.669 40.538,45.669 40.411,45.542 40.411,40.462 40.284,40.335 39.802,40.335 39.675,40.208 39.675,36.626 39.548,36.5 39.369,36.5 39.243,36.626 39.243,40.335 39.116,40.462 38.633,40.462 38.506,40.335 38.506,38.321 38.387,38.202 38.219,38.202 38.1,38.321 38.1,40.514 37.974,40.64 37.795,40.64 37.668,40.514 37.668,38.659 37.541,38.532 37.338,38.532 37.211,38.659 37.211,41.046
D9:  | length 46.2
  L4_SIG w0.102: 32.618,53.649 32.588,53.649 32.461,53.776 32.461,54.356 32.588,54.483 36.134,54.483 36.246,54.371 36.246,54.214 36.134,54.102 35.103,54.102 34.976,53.975 34.976,53.543 34.849,53.416 34.67,53.416 34.544,53.543 34.544,54.026 34.417,54.153 33.172,54.153 33.045,54.026 33.045,53.34 32.918,53.213 32.283,53.213 32.156,53.086 32.156,50.419 32.283,50.292 33.401,50.292 33.63,50.063 33.63,48.27 33.741,48.158 33.899,48.158 34.011,48.27 34.011,50.114 34.138,50.241 34.823,50.241 35.001,50.063 35.001,48.311 35.128,48.184 35.312,48.184 35.439,48.311 35.439,50.02 35.558,50.14 35.726,50.14 35.845,50.02 35.845,48.311 35.972,48.184 36.17,48.184 36.297,48.311 36.297,48.972 36.423,49.098 36.602,49.098 36.728,48.972 36.728,45.085 36.601,44.958 36.424,44.958 36.297,45.085 36.297,47.717 36.185,47.828 36.027,47.828 35.916,47.717 35.916,44.679 36.043,44.552 38.887,44.552 39.014,44.425 39.014,43.536 38.887,43.409 37.516,43.409 37.389,43.282 37.389,42.164 37.262,42.037 37.186,42.037
D10:  | length 36.8
  L4_SIG w0.102: 33.401,52.832 33.477,52.756 35.306,52.756 35.433,52.883 35.433,53.467 35.56,53.594 35.865,53.594 35.992,53.467 35.992,53.213 36.119,53.086 36.347,53.086 36.525,53.264 37.592,53.264 37.821,53.035 37.821,52.553 37.694,52.426 37.16,52.426 37.033,52.553 37.033,52.84 36.914,52.959 36.746,52.959 36.627,52.84 36.627,52.197 36.754,52.07 37.364,52.07 37.49,51.944 37.49,51.765 37.364,51.638 36.805,51.638 36.678,51.511 36.678,51.206 36.805,51.079 37.973,51.079 38.1,51.206 38.1,51.511 38.227,51.638 38.379,51.638 38.506,51.511 38.506,51.206 38.633,51.079 38.913,51.079 39.675,50.317 39.675,49.682 39.827,49.53 42.647,49.53 42.774,49.403 42.774,47.981 42.52,47.727 40.183,47.727 40.056,47.6 40.056,47.371 40.157,47.269 41.689,47.269 41.808,47.15 41.808,46.982 41.689,46.863 40.157,46.863 40.056,46.761 40.056,46.533 40.157,46.431 41.326,46.431 41.427,46.33 41.427,46.126 41.326,46.025 40.157,46.025 40.056,45.923 40.056,40.767 39.929,40.64 39.497,40.64 39.37,40.767 39.37,40.996
D11:  | length 45.6
  L4_SIG w0.102: 32.639,51.435 32.588,51.435 32.461,51.308 32.461,50.724 32.588,50.597 32.893,50.597 33.02,50.724 33.02,52.045 33.147,52.172 33.376,52.172 33.503,52.045 33.503,50.622 33.63,50.495 33.811,50.495 33.938,50.622 33.938,52.07 34.065,52.197 34.218,52.197 34.345,52.07 34.345,50.665 34.464,50.546 34.632,50.546 34.751,50.665 34.751,52.07 34.878,52.197 35.03,52.197 35.157,52.07 35.157,50.597 35.284,50.47 35.484,50.47 35.611,50.597 35.611,51.537 35.738,51.664 35.941,51.664 36.068,51.537 36.068,50.571 36.297,50.343 36.297,49.555 36.424,49.428 36.627,49.428 36.754,49.555 36.754,50.343 36.881,50.47 37.135,50.47 37.262,50.343 37.262,48.971 37.389,48.844 37.694,48.844 37.821,48.717 37.821,46.685 37.948,46.558 39.335,46.558 39.446,46.447 39.446,46.289 39.335,46.177 37.889,46.177 37.77,46.058 37.77,45.89 37.889,45.771 39.32,45.771 39.446,45.644 39.446,45.465 39.32,45.339 37.567,45.339 37.44,45.466 37.44,48.42 37.32,48.539 37.152,48.539 37.033,48.42 37.033,45.06 37.16,44.933 39.243,44.933 39.37,44.806 39.37,43.231 39.243,43.104 37.871,43.104 37.744,42.977 37.744,41.148 37.871,41.021 38.227,41.021
D12:  | length 46.3
  L4_SIG w0.102: 32.639,52.832 32.639,52.578 32.766,52.451 36.246,52.451 36.373,52.324 36.373,50.902 36.5,50.775 38.557,50.775 38.684,50.648 38.684,50.165 38.557,50.038 38.354,50.038 38.227,50.165 38.227,50.343 38.1,50.47 37.897,50.47 37.77,50.343 37.77,49.2 37.897,49.073 38.811,49.073 38.938,49.2 38.938,50.089 39.065,50.216 39.244,50.216 39.37,50.089 39.37,49.352 39.497,49.225 42.351,49.225 42.469,49.108 42.469,48.941 42.351,48.824 38.899,48.824 38.786,48.711 38.786,48.551 38.899,48.438 42.35,48.438 42.469,48.319 42.469,48.151 42.35,48.031 38.288,48.031 38.176,47.92 38.176,47.762 38.288,47.65 39.636,47.65 39.751,47.535 39.751,47.372 39.636,47.257 38.317,47.257 38.202,47.141 38.202,46.978 38.317,46.863 39.624,46.863 39.751,46.736 39.751,42.926 39.624,42.799 38.212,42.799 38.1,42.687 38.1,42.53 38.212,42.418 39.599,42.418 39.726,42.292 39.726,41.631 39.599,41.504 39.294,41.504 39.167,41.631 39.167,41.91 39.04,42.037 38.887,42.037 38.76,41.91 38.76,41.605 38.633,41.478 38.354,41.478 38.227,41.605 38.227,41.986
D13:  | length 55.5
  L4_SIG w0.102: 30.201,51.943 30.48,51.943 30.607,51.816 30.607,51.257 30.48,51.13 29.845,51.13 29.718,51.257 29.718,52.172 29.592,52.299 29.413,52.299 29.286,52.172 29.286,51.257 29.159,51.13 29.007,51.13 28.88,51.257 28.88,51.74 28.753,51.867 28.6,51.867 28.473,51.74 28.473,51.232 28.346,51.105 27.203,51.105 27.076,50.978 27.076,49.835 27.33,49.581 27.33,47.092 27.457,46.965 28.651,46.965 28.778,46.838 28.778,46.685 28.905,46.558 31.013,46.558 31.14,46.431 31.14,45.644 31.267,45.517 31.496,45.517 31.598,45.618 31.598,46.439 31.717,46.558 31.885,46.558 32.004,46.439 32.004,45.618 32.106,45.517 32.283,45.517 32.41,45.644 32.41,46.025 32.537,46.152 32.716,46.152 32.842,46.025 32.842,45.644 32.969,45.517 33.172,45.517 33.35,45.339 33.35,44.978 33.452,44.876 34.222,44.876 34.341,44.757 34.341,44.589 34.222,44.47 33.452,44.47 33.35,44.368 33.35,44.165 33.452,44.063 34.222,44.063 34.341,43.944 34.341,43.776 34.222,43.657 33.452,43.657 33.35,43.555 33.35,43.307 33.477,43.18 33.96,43.18 34.087,43.053 34.087,38.887 34.239,38.735 36.703,38.735 39.675,35.763 39.675,35.409 41.251,33.833 43.866,33.833 43.993,33.706 43.993,33.527 43.866,33.401 42.113,33.401 41.986,33.274 41.986,32.512 42.113,32.385 43.892,32.385 44.018,32.259 44.018,32.08 43.892,31.953 42.482,31.953 42.367,31.839 42.367,31.677 42.482,31.562 43.239,31.562 43.358,31.443 43.358,31.275 43.239,31.156 42.52,31.156 42.393,31.029 42.393,29.871
D14:  | length 54.2
  L4_SIG w0.102: 30.94,55.601 31.064,55.476 31.064,55.067 30.937,54.94 30.683,54.94 30.556,54.813 30.556,54.188 30.445,54.077 30.287,54.077 30.175,54.188 30.175,54.864 30.048,54.991 29.616,54.991 29.096,54.47 29.096,54.102 28.969,53.975 28.6,53.975 28.397,53.772 28.397,52.553 27.584,51.74 26.568,51.74 26.441,51.613 26.441,49.911 25.883,49.352 25.883,46.075 26.009,45.949 26.188,45.949 26.314,46.075 26.314,49.309 26.434,49.428 26.602,49.428 26.721,49.309 26.721,45.618 26.848,45.491 27.076,45.491 27.178,45.593 27.178,46.21 27.297,46.33 27.465,46.33 27.584,46.21 27.584,45.593 27.686,45.491 28.308,45.491 28.41,45.593 28.41,45.847 28.511,45.949 28.715,45.949 28.816,45.847 28.816,45.593 28.918,45.491 29.121,45.491 29.223,45.593 29.223,45.847 29.324,45.949 29.502,45.949 29.629,45.822 29.629,45.026 29.748,44.907 29.916,44.907 30.035,45.026 30.035,45.822 30.162,45.949 30.315,45.949 30.442,45.822 30.442,45.034 30.569,44.907 32.588,44.907 32.715,44.78 32.715,41.605 32.842,41.478 33.325,41.478 33.452,41.351 33.452,38.633 34.925,37.16 34.925,36.652 35.027,36.551 36.801,36.551 40.679,32.673 40.937,32.673 41.626,31.983 41.626,29.828
D15:  | length 55.8
  L4_SIG w0.102: 30.218,52.849 30.125,52.756 29.954,52.756 29.845,52.865 29.845,54.27 29.733,54.381 29.576,54.381 29.464,54.27 29.464,52.733 29.36,52.629 29.213,52.629 29.108,52.733 29.108,53.526 28.989,53.645 28.821,53.645 28.702,53.526 28.702,52.426 27.686,51.41 26.899,51.41 26.772,51.283 26.772,49.708 27.026,49.454 27.026,46.787 27.153,46.66 28.321,46.66 28.448,46.533 28.448,46.38 28.575,46.253 30.658,46.253 30.785,46.126 30.785,45.339 30.912,45.212 32.918,45.212 33.045,45.085 33.045,42.748 33.172,42.621 33.656,42.621 33.782,42.495 33.782,42.316 33.656,42.189 33.132,42.189 33.02,42.078 33.02,41.92 33.132,41.808 33.63,41.808 33.757,41.681 33.757,38.763 34.14,38.379 35.484,38.379 35.611,38.252 35.611,38.065 35.484,37.938 34.993,37.938 34.874,37.819 34.874,37.65 34.993,37.531 35.458,37.531 35.56,37.43 35.56,36.975 35.679,36.855 35.847,36.855 35.966,36.975 35.966,38.227 36.093,38.354 36.652,38.354 37.146,37.86 37.146,37.716 36.579,37.148 36.579,36.98 36.698,36.861 36.866,36.861 37.434,37.428 37.578,37.428 37.722,37.285 37.722,37.141 37.281,36.7 37.281,36.532 37.4,36.413 37.568,36.413 38.009,36.853 38.153,36.853 38.297,36.71 38.297,36.566 37.856,36.125 37.856,35.956 37.975,35.838 38.143,35.838 38.584,36.278 38.728,36.278 39.345,35.662 39.345,35.16 39.07,34.886 39.07,34.742 39.214,34.598 39.358,34.598 39.608,34.848 39.752,34.848 39.895,34.705 39.895,34.561 39.645,34.311 39.645,34.167 39.789,34.023 39.933,34.023 40.183,34.273 40.327,34.273 40.47,34.129 40.47,33.986 40.22,33.736 40.22,33.592 40.364,33.448 40.508,33.448 40.758,33.698 40.902,33.698 41.271,33.329 41.271,32.77 42.037,32.004 42.037,28.878 42.162,28.753 42.299,28.753 42.426,28.88 42.426,29.028
D16:  | length 43.1
  L4_SIG w0.102: 38.989,57.658 38.837,57.658 38.71,57.785 38.71,58.903 38.583,59.03 37.897,59.03 37.77,58.903 37.77,58.559 37.871,58.458 38.286,58.458 38.405,58.339 38.405,58.171 38.286,58.051 37.871,58.051 37.77,57.95 37.77,57.747 37.871,57.645 38.413,57.645 38.532,57.526 38.532,57.289 38.405,57.162 37.61,57.162 37.49,57.043 37.49,56.875 37.61,56.756 38.489,56.756 38.608,56.637 38.608,56.469 38.489,56.35 37.61,56.35 37.49,56.231 37.49,56.062 37.61,55.943 38.489,55.943 38.608,55.824 38.608,55.656 38.489,55.537 37.617,55.537 37.49,55.41 37.49,55.22 37.617,55.093 38.456,55.093 38.71,54.839 39.294,54.839 39.421,54.712 39.421,53.416 39.548,53.289 39.98,53.289 40.564,52.705 41.478,52.705 41.707,52.476 41.707,51.486 41.834,51.359 46.711,51.359 46.838,51.232 46.838,51.053 46.711,50.927 45.618,50.927 45.491,50.8 45.491,50.571 45.593,50.47 46.718,50.47 46.838,50.351 46.838,50.183 46.718,50.063 45.593,50.063 45.491,49.962 45.491,47.955 43.434,45.898 43.434,43.409 43.307,43.282 42.062,43.282 41.935,43.155 41.935,39.903 42.062,39.776 42.241,39.776 42.367,39.903 42.367,40.335
D17:  | length 44.7
  L4_SIG w0.102: 39.37,56.693 39.776,56.693 39.903,56.566 39.903,56.363 39.776,56.236 39.065,56.236 38.938,56.109 38.938,55.296 39.065,55.169 40.437,55.169 40.564,55.042 40.564,54.889 40.437,54.762 39.827,54.762 39.7,54.635 39.7,54.483 39.827,54.356 40.361,54.356 40.488,54.229 40.488,54.102 40.361,53.975 39.827,53.975 39.7,53.848 39.7,53.696 39.827,53.569 40.157,53.569 40.792,52.934 41.859,52.934 41.986,52.807 41.986,51.791 42.113,51.664 47.015,51.664 47.142,51.537 47.142,49.759 47.041,49.657 45.915,49.657 45.796,49.538 45.796,49.37 45.915,49.251 47.041,49.251 47.142,49.149 47.142,48.946 47.041,48.844 45.915,48.844 45.796,48.725 45.796,48.557 45.915,48.438 47.041,48.438 47.142,48.336 47.142,48.108 47.041,48.006 45.941,48.006 45.822,47.887 45.822,47.719 45.941,47.6 47.041,47.6 47.142,47.498 47.142,47.295 47.041,47.193 45.179,47.193 45.06,47.074 45.06,46.906 45.179,46.787 47.015,46.787 47.142,46.66 47.142,46.457 47.015,46.33 44.298,46.33 43.764,45.796 43.764,43.053 43.637,42.926 42.393,42.926 42.266,42.799 42.266,42.596 42.393,42.469 42.774,42.469 42.901,42.342 42.901,42.163 42.774,42.037 42.367,42.037 42.24,41.91 42.24,41.656 42.367,41.529 42.799,41.529 42.926,41.402 42.926,41.148 42.799,41.021 42.367,41.021
D18:  | length 48.3
  L4_SIG w0.102: 39.766,57.643 39.446,57.643 39.319,57.516 39.319,57.328 39.446,57.201 40.691,57.201 40.818,57.074 40.818,56.845 40.716,56.744 40.353,56.744 40.234,56.624 40.234,56.456 40.353,56.337 40.673,56.337 40.792,56.218 40.792,56.05 40.673,55.931 39.362,55.931 39.243,55.812 39.243,55.644 39.362,55.524 40.716,55.524 40.818,55.423 40.818,54.051 40.996,53.873 40.996,53.365 41.123,53.238 42.139,53.238 42.266,53.111 42.266,52.095 42.393,51.968 47.422,51.968 47.549,51.841 47.549,46.076 47.422,45.949 44.399,45.949 44.272,45.822 44.272,45.593 44.399,45.466 46.406,45.466 46.533,45.34 46.533,45.161 46.406,45.034 44.221,45.034 44.094,44.907 44.094,44.729 44.221,44.602 46.38,44.602 46.507,44.475 46.507,44.247 46.38,44.12 44.221,44.12 44.094,43.993 44.094,43.764 44.196,43.663 46.388,43.663 46.507,43.543 46.507,43.375 46.388,43.256 44.196,43.256 44.094,43.155 44.094,42.748 43.967,42.621 43.358,42.621 43.231,42.494 43.231,40.03 43.129,39.929 42.824,39.929 42.393,39.497 42.393,38.964
D19:  | length 47.3
  L4_SIG w0.102: 40.995,59.359 41.3,59.359 41.427,59.486 41.427,59.639 41.3,59.766 40.437,59.766 40.31,59.893 40.31,60.528 40.183,60.655 39.98,60.655 39.853,60.528 39.853,58.445 39.726,58.318 39.573,58.318 39.446,58.445 39.446,60.503 39.319,60.63 39.116,60.63 38.989,60.503 38.989,58.175 39.116,58.048 41.25,58.048 41.377,57.921 41.377,56.723 41.478,56.621 42.443,56.621 42.545,56.519 42.545,56.316 42.443,56.215 41.478,56.215 41.377,56.113 41.377,55.91 41.478,55.808 42.443,55.808 42.545,55.707 42.545,55.503 42.443,55.402 41.478,55.402 41.377,55.3 41.377,54.534 41.529,54.381 42.647,54.381 42.774,54.254 42.774,52.705 42.901,52.578 48.26,52.578 48.387,52.451 48.387,44.272 48.26,44.145 47.828,44.145 47.701,44.018 47.701,42.697 47.574,42.57 44.856,42.57 44.729,42.443 44.729,41.961 44.602,41.834 43.993,41.834 43.866,41.707 43.866,39.243 43.764,39.141 43.332,39.141
D20:  | length 43.1
  L4_SIG w0.102: 40.572,58.403 40.259,58.403 40.132,58.53 40.132,58.826 40.259,58.953 41.656,58.953 41.783,58.826 41.783,58.039 41.91,57.912 43.18,57.912 43.307,57.785 43.307,57.551 43.18,57.424 41.885,57.424 41.783,57.322 41.783,57.119 41.885,57.018 44.298,57.018 44.425,56.891 44.425,56.642 44.298,56.515 43.053,56.515 42.926,56.388 42.926,56.236 43.028,56.134 44.28,56.134 44.399,56.015 44.399,55.847 44.28,55.728 43.028,55.728 42.926,55.626 42.926,55.397 43.053,55.27 45.745,55.27 45.872,55.143 45.872,54.458 46.253,54.077 49.657,54.077 49.784,53.95 49.784,39.548 49.657,39.421 46.533,39.421 46.406,39.548 46.406,39.903 46.279,40.03 45.441,40.03 44.958,40.513
D21:  | length 56.6
  L4_SIG w0.102: 40.026,24.274 40.424,23.876 41.275,23.876 41.656,24.257 41.656,25.121 41.707,25.171 41.707,25.18 42.477,25.95 42.74,25.95 43.748,26.958 47.202,26.958 47.422,27.178 47.422,35.636 47.295,35.763 46.507,35.763 46.38,35.89 46.38,36.852 46.482,36.954 47.379,36.954 47.498,37.073 47.498,37.241 47.379,37.36 46.482,37.36 46.38,37.462 46.38,37.665 46.482,37.767 46.812,37.767 46.914,37.868 46.914,38.072 46.812,38.173 46.482,38.173 46.38,38.275 46.38,38.887 46.507,39.014 49.962,39.014 50.089,39.141 50.089,54.254 49.962,54.381 46.38,54.381 46.228,54.534 46.228,55.27 46.482,55.524 46.482,56.261 46.355,56.388 44.958,56.388 44.831,56.515 44.831,57.379 44.704,57.506 43.79,57.506 43.663,57.633 43.663,58.242 43.536,58.369 42.24,58.369 42.113,58.496 42.113,59.36
D22:  | length 56.9
  L4_SIG w0.102: 40.64,57.658 41.021,57.658 41.123,57.556 41.123,54.204 41.25,54.077 42.418,54.077 42.545,53.95 42.545,52.4 42.672,52.273 47.828,52.273 47.955,52.146 47.955,44.958 47.828,44.831 46.939,44.831 46.812,44.704 46.812,43.028 46.685,42.901 44.526,42.901 44.399,42.774 44.399,42.342 44.272,42.215 43.688,42.215 43.561,42.088 43.561,39.7 43.434,39.573 43.028,39.573 42.901,39.446 42.901,38.837 43.028,38.71 45.796,38.71 45.923,38.583 45.923,35.535 46.025,35.433 46.845,35.433 46.965,35.314 46.965,35.146 46.845,35.027 46.025,35.027 45.923,34.925 45.923,34.722 46.025,34.62 46.82,34.62 46.939,34.501 46.939,34.333 46.82,34.214 46.025,34.214 45.923,34.112 45.923,33.884 46.05,33.757 46.965,33.757 47.092,33.63 47.092,27.432 46.965,27.305 43.544,27.305 41.08,24.841 41.08,24.528 40.826,24.274
D23:  | length 54.7
  L4_SIG w0.102: 40.826,23.474 40.847,23.495 41.427,23.495 41.91,23.978 41.91,25.095 42.393,25.578 42.799,25.578 43.79,26.568 47.676,26.568 47.803,26.695 47.803,37.998 47.93,38.125 50.267,38.125 50.394,38.252 50.394,54.559 50.267,54.686 47.346,54.686 47.219,54.813 47.219,56.769 47.092,56.896 45.314,56.896 45.187,57.023 45.187,57.277 45.314,57.404 47.092,57.404 47.219,57.531 47.219,57.785 47.092,57.912 44.171,57.912 44.044,58.039 44.044,58.598 43.866,58.776 42.545,58.776
D24:  | length 27.4
  L4_SIG w0.102: 43.155,53.569 43.485,53.238 49.047,53.238 49.174,53.111 49.174,40.31 49.047,40.183 47.193,40.183 47.066,40.31 47.066,41.631 46.939,41.758 45.669,41.758 45.542,41.631 45.542,41.224 45.415,41.097 44.628,41.097 44.501,40.97 44.501,39.751 44.628,39.624 44.933,39.624
D25:  | length 32.5
  L4_SIG w0.102: 41.732,54.737 41.732,54.813 41.859,54.94 43.028,54.94 43.155,54.813 43.155,54.178 43.282,54.051 43.49,54.051 43.609,54.17 43.609,54.813 43.736,54.94 43.993,54.94 44.12,54.813 44.12,53.721 44.247,53.594 44.45,53.594 44.577,53.721 44.577,54.839 44.704,54.966 44.933,54.966 45.06,54.839 45.06,53.696 45.187,53.569 49.352,53.569 49.479,53.442 49.479,39.929 49.352,39.802 46.838,39.802 46.711,39.929 46.711,41.326 46.584,41.453 46.101,41.453 45.974,41.326 45.974,40.513
D26:  | length 33.4
  L4_SIG w0.102: 43.18,52.959 43.231,52.908 48.641,52.908 48.768,52.781 48.768,41.25 48.641,41.123 48.59,41.123 48.463,41.25 48.463,43.612 48.336,43.739 48.158,43.739 48.031,43.612 48.031,42.24 47.904,42.113 47.904,40.97 47.777,40.843 47.574,40.843 47.447,40.97 47.447,42.139 47.32,42.266 45.263,42.266 45.136,42.139 45.136,41.605 45.009,41.478 44.298,41.478 44.171,41.351 44.171,39.141 44.298,39.014 45.847,39.014 45.974,39.141 45.974,39.497
D27:  | length 56.8
  L4_SIG w0.102: 39.787,52.882 39.98,52.882 40.386,52.476 41.275,52.476 41.402,52.349 41.402,51.181 41.529,51.054 45.034,51.054 45.161,50.927 45.161,48.082 43.129,46.05 43.129,43.739 43.002,43.612 41.758,43.612 41.631,43.485 41.631,39.141 41.986,38.786 41.986,37.719 42.088,37.617 42.291,37.617 42.393,37.719 42.393,38.387 42.512,38.506 42.68,38.506 42.799,38.387 42.799,37.719 42.901,37.617 43.104,37.617 43.205,37.719 43.205,38.278 43.332,38.405 45.491,38.405 45.618,38.278 45.618,38.125 45.491,37.998 44.78,37.998 44.653,37.872 44.653,37.693 44.78,37.567 45.491,37.567 45.618,37.44 45.618,32.995 45.745,32.868 46.558,32.868 46.685,32.741 46.685,31.242 46.558,31.115 45.745,31.115 45.618,30.988 45.618,29.972 45.745,29.845 46.558,29.845 46.685,29.718 46.685,29.515 46.558,29.388 45.72,29.388 45.593,29.261 45.593,29.083 45.72,28.956 46.617,28.956 46.736,28.837 46.736,28.669 46.617,28.55 45.72,28.55 45.593,28.423 45.593,28.194 45.72,28.067 46.558,28.067 46.685,27.94 46.685,27.737 46.558,27.61 43.358,27.61 42.824,27.076 42.824,26.949 40.513,24.638 39.878,24.638 39.624,24.384 39.624,24.006 40.03,23.599 40.03,23.442